# Altium PCB CH9329.PcbDoc
Units mil, origin at the board's own origin, x right, y up, seen from the top; angles counter-clockwise.
Board outline 1690.03 x 780.03 mil, 2 copper layers (Top Layer, Bottom Layer); 23 components, 19 nets, 68 pads, 14 vias.
Unrouted connection lines stored in the file: 1.
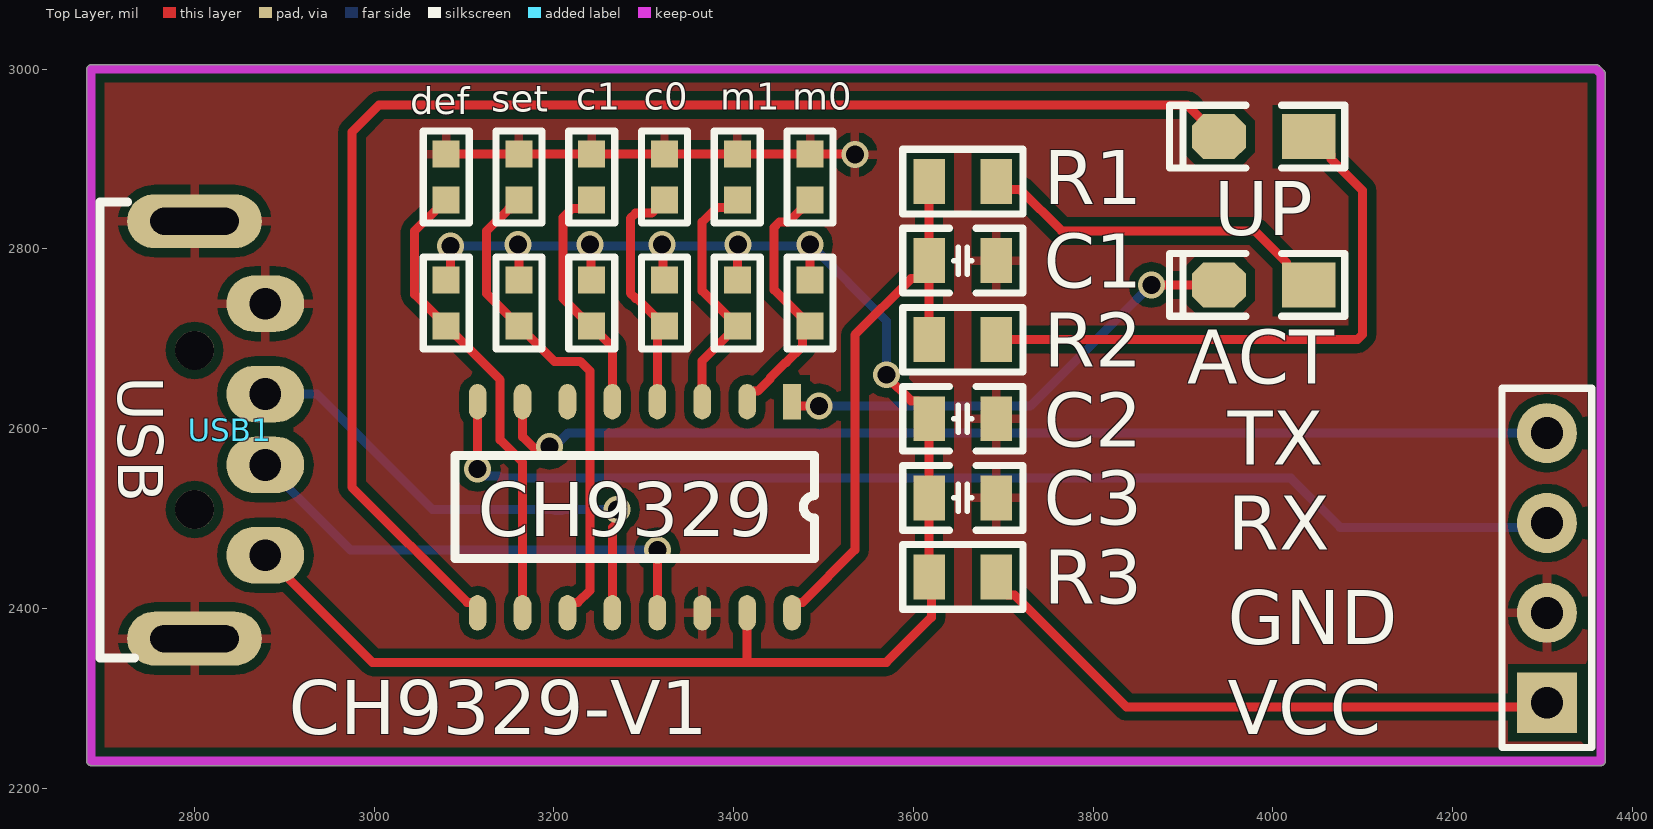
[diagram p0: Top Layer view]
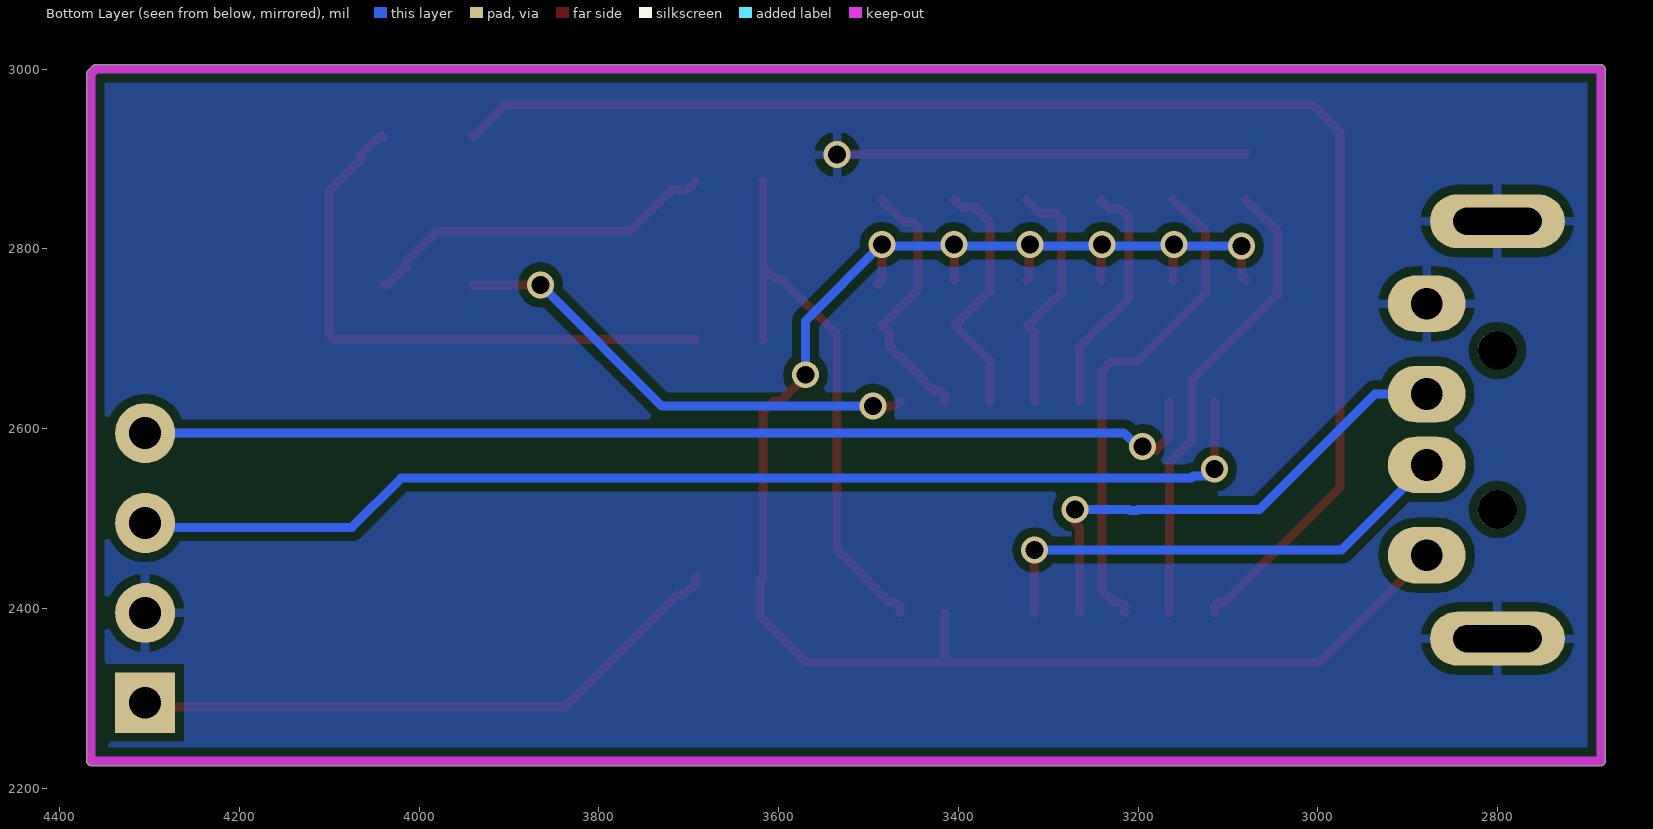
[diagram p1: Bottom Layer view, seen from below]

## Layer stack, top to bottom
Top Solder: solder mask 0.4, Solder Resist, Dk 3.5
Top Layer: signal copper 1.4
Dielectric 1: dielectric 12.6, FR-4, Dk 4.8
Bottom Layer: signal copper 1.4
Bottom Solder: solder mask 0.4, Solder Resist, Dk 3.5

## Board outline
2679.99,2230 ccw(c2685,2230) 2685,2224.99 4365,2224.99 ccw(c4365,2230) 4370.02,2230 4370.02,2995 ccw(c4365,2995) 4368.53,2998.56 4368.55,2998.55 4363.55,3003.55 4363.56,3003.53 ccw(c4360,3000) 4360,3005.01 2685,3005.01 ccw(c2685,3000) 2679.99,3000

## Design rules (kind name [scope] priority, off if disabled: settings)
Clearance [All] p1: gap=10 ignorepadtopadclearanceinfootprint=FALSE except(0: Arc-Hole Track-Hole SMDPad-Hole THPad-Hole Via-Hole Fill-Hole Poly-Hole Region-Hole Text-Hole)
PolygonConnect [All] p1: connectstyle=Relief reliefconductorwidth=10 reliefentries=4 polygonreliefangle="90 Angle" airgapwidth=10
RoomDefinition CH9329 [InComponentClass('CH9329')] p1: confinementstyle=ConfineIn formatcopy=TRUE lockcomponents=FALSE outline 1975,2230 4365,2230 4365,3000 1975,3000
RoutingVias [All] p1: holewidth=20 width=30 viastyle="Through Hole" minholewidth=20 minwidth=10 maxholewidth=28 maxwidth=50
SolderMaskExpansion [All] p1: expansion=4 istentingtop=FALSE
UnpouredPolygon [InNet('GND')] p1:
Width [All] p1: maxlimit=10 minlimit=10 preferedwidth=10
29 further rules are at their usual default settings.

## Classes and differential pairs
component class CH9329: C2 C3 CH9329 R1 R2 R3 U1 USB1

## Components (designator, comment, footprint, x,y, rotation, side; value= is the part's Value field where it differs from the comment)
ACT "红色" "LED 0805G" 3990,2760 r180 top (schematic designator LED1)
c0 "1K" "R 0603_L" 3323.01,2880 r270 top (schematic designator R12)
c1 "1K" "R 0603_L" 3242.01,2880 r270 top (schematic designator R13)
C1 "0.1uF" "C 0805_L" 3655,2787 r180 top
C2 "0.1uF" "C 0805_L" 3655,2611 r180 top
C3 "10uF" "C 0805_L" 3655,2522.99 r180 top
CH9329 "CH9329" ch9329 3465,2635 r270 top (schematic designator U)
def "1K" "R 0603_L" 3080.01,2880 r270 top (schematic designator R15)
JP7 "HDR-1X4" HDR2.54-LI-4P 4305,2445 r90 top
m0 "1K" "R 0603_L" 3485.01,2880 r270 top (schematic designator R10)
m1 "1K" "R 0603_L" 3404.01,2880 r270 top (schematic designator R11)
R1 "10K" "R 0805_L" 3655,2875 r180 top
R2 "10K" "R 0805_L" 3655,2699 r180 top
R3 "0" "R 0805_L" 3655,2435 r0 top
R4 "1K" "R 0603_L" 3485,2740 r90 top
R5 "1K" "R 0603_L" 3404,2740 r90 top
R6 "1K" "R 0603_L" 3323,2740 r90 top
R7 "1K" "R 0603_L" 3242,2740 r90 top
R8 "1K" "R 0603_L" 3161,2740 r90 top
R9 "1K" "R 0603_L" 3080,2740 r90 top
set "1K" "R 0603_L" 3161.01,2880 r270 top (schematic designator R14)
UP "红色" "LED 0805G" 3990,2925 r180 top (schematic designator LED2)
USB1 "USB" USB_A/P_A 2800,2598.58 r270 top

## Footprints (in the part's own frame and the unit in brackets; to place one, negate y for a bottom-side part, rotate by r counter-clockwise, add the part's x,y. Pads: shape width x height; smd on the part's side, far side on the other; paste and mask are expansions set on the pad)
"C 0805_L" [mil] "无极性贴片电容"
  rect 35x50 smd: 1(-37.4,0) 2(37.4,0)
  silkscreen extent -67,-36 67,36, body extent -39,-24 39,24, height 20
ch9329 [mm]
  rect 1x0.5 smd: 1(0.127,0)
  oval 1x0.5 smd: 2(0.127,-1.27) 3(0.127,-2.54) 4(0.127,-3.81) 5(0.127,-5.08) 6(0.127,-6.35) 7(0.127,-7.62) 8(0.127,-8.89) 9(6.096,-8.89) 10(6.096,-7.62) 11(6.096,-6.35) 12(6.096,-5.08) 13(6.096,-3.81) 14(6.096,-2.54) 15(6.096,-1.27) 16(6.096,0)
  silkscreen extent 1.64,-9.53 4.56,0.64
HDR2.54-LI-4P [mm] "排针，4脚"
  rect 1.7x1.7 hole 0.9: 1(-3.81,0)
  round 1.7 hole 0.9: 2(-1.27,0) 3(1.27,0) 4(3.81,0)
  silkscreen extent -5.08,-1.27 5.08,1.27, body extent -5.08,-1.27 5.08,1.27, height 8.5
"LED 0805G" [mil] "绿色0805LED"
  rect 60x50 smd: 1(-50,0)
  oct 60x50 smd: 2(50,0)
  silkscreen extent -90,-35 105,35, body extent -39,-25 39,25, height 32
"R 0603_L" [mil] "1/10W贴片电阻"
  rect 30x30 smd: 1(-25.59,0) 2(25.59,0)
  silkscreen extent -51,-26 51,26, body extent -31,-16 32,16, height 16
"R 0805_L" [mil] "1/8W贴片电阻"
  rect 35x50 smd: 1(-37.4,0) 2(37.4,0)
  silkscreen extent -67,-36 67,36, body extent -39,-25 39,25, height 20
USB_A/P_A [mm] "A型USB 插头，20*13*4.5mm"
  round 1.1 hole 1.1: 0(-2.25,0) 0(2.25,0)
  oval 1.6x2.2 hole 0.9: 1(3.543,2) 2(0.987,2) 3(-1.013,2) 4(-3.569,2)
  oval 1.524x3.81 hole 0.762 slot 2.5 at 90 deg: 4(-5.9,0) 4(5.9,0)
  silkscreen extent -6.45,-2.67 6.45,-1.7, body extent -6.47,-17.9 6.47,2.1, height 3.25

## Part data
ACT UP: library part LED-SMD, "贴片LED", BOM名称=贴片LED, 学习资源=www.ooocke.com, 版权归属=源创客
c0 c1 def m0 m1 R1 R2 R3 R4 R5 R6 R7 R8 R9 set: library part R, "贴片电阻", BOM名称=贴片电阻, 学习资源=www.ooocke.com, 版权归属=源创客
C1 C2 C3: library part C, "无极性贴片电容", BOM名称=无极性贴片电容, 学习资源=www.ooocke.com, 版权归属=源创客
JP7: library part "Header 4", "4P接插件", BOM名称=4P接插件, 学习资源=www.ooocke.com, 版权归属=源创客
USB1: library part USB-A/P, "USB-A型公接口", BOM名称=USB-A型公接口, 学习资源=www.ooocke.com, 版权归属=源创客

## Via types
v1: diameter 30, hole 20, Top Layer to Bottom Layer, 14 vias

## Nets (pads, with @x,y where several pads share a name; then routed paths per layer and width w, separated by ;. In a path a pad name is that pad's centre, name@x,y a point inside that pad or via, vN(x,y) a via of type N, cw(c..) or ccw(c..) an arc to the next point about the centre after c; other vN are vias at no path point)
ACT#: ACT.2 CH9329.1 | length 533
  Top Layer w10: CH9329.1 3470,2625 v1(3495,2625) ; v1(3865,2760) ACT.2
  Bottom Layer w10: v1(3495,2625) 3730,2625 v1(3865,2760)
CFG0: c0.2 CH9329.4 R6.1 | length 270.5
  Top Layer w10: CH9329.4 3315,2706.4 R6.1 3301.82,2735.59 3292.38,2745 3290.86,2745 3285,2750.86 3285,2834.14 3290.86,2840 3308.59,2840 c0.2
CFG1: c1.2 CH9329.5 R7.1 | length 268.7
  Top Layer w10: c1.2 3232.69,2845.1 3220.1,2845.1 3210,2835 3210,2745 3230.59,2724.41 3232,2724.41 R7.1 3265,2691.41 CH9329.5
DEF: CH9329.10 def.2 R9.1 | length 524
  Top Layer w10: def.2 3070,2844.41 3069.41,2844.41 3045,2820 3045,2749.38 3058.79,2735.59 R9.1 3140.16,2654.25 3140.16,2587.38 3165,2562.54 CH9329.10
GND: c0.1 C1.1 c1.1 C2.1 C3.1 CH9329.14 def.1 JP7.2 m0.1 m1.1 set.1 USB1.4 | length 455.2
  Top Layer w10: def.1 set.1 c1.1 c0.1 m1.1 m0.1 3534.41,2905.59 v1(3535,2905)
MODE0: CH9329.2 m0.2 R4.1 | length 296.9
  Top Layer w10: CH9329.2 3415,2637.22 3419.47,2641.7 3426.7,2641.7 3440.16,2655.16 3440.16,2655.9 3458.01,2673.75 3458.75,2673.75 3476.6,2691.6 3476.6,2706 R4.1 3463.82,2735.59 3445,2754.38 3445,2824.14 3450.86,2830 3460.59,2830 m0.2
MODE1: CH9329.3 m1.2 R5.1 | length 281.4
  Top Layer w10: CH9329.3 3365,2675.4 R5.1 3382.82,2735.59 3365,2753.38 3365,2830 3381.1,2846.1 3395.69,2846.1 m1.2
NetJP7_1: JP7.1 R3.2 | length 679.1
  Top Layer w10: R3.2 3692.4,2427.5 3704.9,2415 3712.4,2415 3837.4,2290 4300,2290 JP7.1
NetLED1_1: ACT.1 R1.1 | length 398.2
  Top Layer w10: R1.1 3701.45,2865.95 3719.05,2865.95 3765,2820 3980,2820 4015,2785 4015,2780 4035,2760 ACT.1
NetLED2_1: R2.1 UP.1 | length 657.9
  Top Layer w10: R2.1 4094.14,2699 4100,2704.86 4100,2865 4065,2900 4065,2905 4045,2925 UP.1
RST: CH9329.6
RXD: CH9329.8 JP7.3 | length 1294
  Top Layer w10: v1(3115,2555) CH9329.8
  Bottom Layer w10: v1(3115,2555) 3122.65,2547.35 3138.51,2547.35 3140.86,2545 4020,2545 4075,2490 4300,2490 JP7.3
SET: CH9329.11 R8.1 set.2 | length 554.2
  Top Layer w10: set.2 3151,2844.41 3149.41,2844.41 3125,2820 3125,2750.38 3139.79,2735.59 R8.1 3200.41,2675 3229.14,2675 3239.84,2664.3 3239.84,2419.84 3226.7,2406.7 3219.47,2406.7 3215,2402.22 CH9329.11
TXD: CH9329.7 JP7.4 | length 1193.3
  Top Layer w10: CH9329.7 3165,2590.82 3180,2575.82 3184.18,2580 v1(3195,2580)
  Bottom Layer w10: v1(3195,2580) 3200.41,2580 3215.41,2595 JP7.4
UD+: CH9329.12 USB1.3 | length 562.3
  Top Layer w10: CH9329.12 3265,2489.75 3270,2494.75 v1(3270,2510)
  Bottom Layer w10: USB1.3 2936.53,2638.47 3065,2510 3200,2510 3200.86,2509.14 3209.14,2509.14 3210,2510 v1(3270,2510)
UD-: CH9329.13 USB1.2 | length 545.5
  Top Layer w10: CH9329.13 v1(3315,2465)
  Bottom Layer w10: USB1.2 2973.47,2465 v1(3315,2465)
UP: CH9329.9 UP.2 | length 1589.1
  Top Layer w10: CH9329.9 3115,2402.22 3110.53,2406.7 3103.3,2406.7 2975,2535 2975,2930 3005,2960 3905,2960 UP.2
V33: C1.2 CH9329.16 R1.2 R2.2 | length 632.3
  Top Layer w10: CH9329.16 3465,2402.22 3469.47,2406.7 3476.7,2406.7 3535,2465 3535,2704.4 3597.6,2767 3605.1,2767 C1.2@3617.6,2779.5 ; R2.2 C1.2@3617.6,2779.5 ; R1.2 C1.2 C1.2@3617.6,2779.5
VCC: C2.2 C3.2 CH9329.15 R3.1 R4.2 R5.2 R6.2 R7.2 R8.2 R9.2 USB1.1 | length 1990.1
  Top Layer w10: USB1.1 2997.84,2340 3415,2340 ; R9.2 3085,2770.58 v1(3085,2803.43) ; v1(3160,2805) 3161,2804 R8.2 ; v1(3240,2805) 3241.13,2803.87 3241.13,2766.46 R7.2 ; v1(3320,2805) 3321.13,2803.87 3321.13,2767.46 R6.2 ; R5.2 3404,2804 v1(3405,2805) ; CH9329.15 3415,2340 ; v1(3485,2805) R4.2 R4.2@3490.59,2760 ; v1(3570,2660) 3570,2658.6 3597.6,2631 3605.1,2631 3617.6,2618.5 C2.2 C3.2 R3.1 3620,2432.59 3620,2390 3570,2340 3415,2340
  Bottom Layer w10: v1(3085,2803.43) 3483.43,2803.43 v1(3485,2805) 3570,2720 v1(3570,2660)
pads on no net: USB1.0

## Polygon pours and split planes (outlines as drawn)
GND on Bottom Layer "Top Layer-No Net1" (solid, remove dead copper, pour order 1): 2679.99,2230 ccw(c2685,2230) 2685,2224.99 4365,2224.99 ccw(c4365,2230) 4370.02,2230 4370.02,2995 ccw(c4365,2995) 4368.53,2998.56 4368.55,2998.55 4363.55,3003.55 4363.56,3003.53 ccw(c4360,3000) 4360,3005.01 2685,3005.01 ccw(c2685,3000) 2679.99,3000
GND on Top Layer "Top Layer-No Net" (solid, remove dead copper, pour order 0): 2679.99,2230 ccw(c2685,2230) 2685,2224.99 4365,2224.99 ccw(c4365,2230) 4370.02,2230 4370.02,2995 ccw(c4365,2995) 4368.53,2998.56 4368.55,2998.55 4363.55,3003.55 4363.56,3003.53 ccw(c4360,3000) 4360,3005.01 2685,3005.01 ccw(c2685,3000) 2679.99,3000

## Keep-outs
Keep-Out Layer:
  lines w10: 2685,2230 4365,2230 4365,2995 4360,3000 2685,3000 2685,2230

## Silkscreen, mask and mechanical layers (free items; w line width, h text height)
Top Overlay:
  text "TX" at 3950,2560 h60
  text "RX" at 3950,2465 h60
  text "GND" at 3950,2360 h60
  text "CH9329-V1" at 2905,2260 h60
  text "VCC" at 3950,2260 h60